# EAGLE board STorM32 NT splitter v001 (EAGLE 6.5.0)
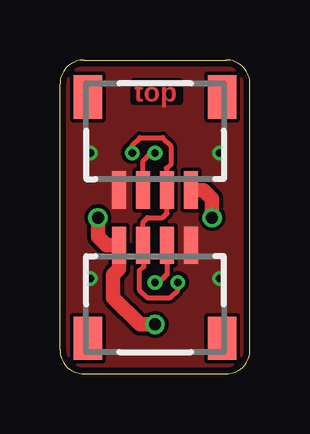
[diagram p0: board, top side]
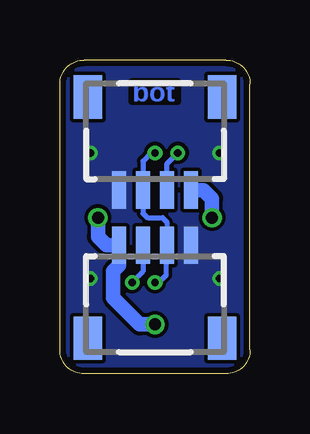
[diagram p1: board, bottom side, seen from below]

Size 7.94 x 13.08 mm. Coordinates in mm from the lower left corner, seen from the top.
Outline: 1,13.08 6.94,13.08 arc-90 7.94,12.08 7.94,1 arc-90 6.94,0 1,0 arc-90 0,1 0,12.08 arc-90 1,13.08
Copper layers (1*16): Top 0.035mm / dielectric 1.5mm / Bottom 0.035mm
Design rules "Fusion_eagle_rule_v1.1-shapes-supply-changed": minimum track width 6mil, minimum drill 12mil, track to track 6mil, track to pad 6mil, pad to pad 6mil, via to via 6mil, smd to smd 0mil, copper to edge 10mil, drill to drill 10mil, minimum pad ring 10mil, minimum via ring 6mil, stop-mask expansion 2mil, vias tented up to drill 100mil, thermal gap 6mil

## Footprints (pad centres in the part's own frame; a part is rotated, then mirrored left to right if it is on the bottom)
SM04B-SRSS-TB = smd 0.6 x 1.55: 1 -1.5,2.975; 2 -0.5,2.975; 3 0.5,2.975; 4 1.5,2.975 | smd 1.2 x 1.8: FIT@1 -2.8,-0.9; FIT@2 2.8,-0.9

## Placement (x,y rotation side)
NTX  NTX  [SM04B-SRSS-TB]  3.97,2.38 0 top
NTX1  NTX  [SM04B-SRSS-TB]  3.97,10.64 180 bottom
NTX2  NTX  [SM04B-SRSS-TB]  3.97,2.38 0 bottom
NTX3  NTX  [SM04B-SRSS-TB]  3.97,10.64 180 top

## Library data of the parts
NTX NTX1-NTX3 = con-jst2

## Nets
5V: NTX1.1 NTX2.1 NTX3.1 NTX.1
GND: NTX1.4 NTX2.4 NTX3.4 NTX.4
RX: NTX1.2 NTX2.2 NTX3.2 NTX.2
TX: NTX1.3 NTX2.3 NTX3.3 NTX.3

## Tracks (layer width: path | path; a pad name or v marks a point on that pad's centre or on a via)
5V  (via drill 0.5)
  Top 0.61: v1.59,6.51 1.59,5.71 1.95,5.36 NTX.1 2.47,4.37 2.22,4.13 2.22,3.17 3.33,2.06 v3.97,2.06 | NTX3.1 5.99,7.66 6.35,7.3 v6.35,6.51
  Bottom 0.61: v1.59,6.51 1.59,7.3 1.95,7.66 NTX1.1 | v6.35,6.51 6.35,5.71 5.99,5.36 NTX2.1 5.47,4.53 5.71,4.29 5.71,3.17 4.6,2.06 v3.97,2.06
GND  (via drill 0.3)
  other vias: 1.27,3.97 6.67,3.97 1.27,9.21 6.67,9.21
  pour Bottom (isolate 0.152): 0.33,12.08 arc-90 1,12.75 6.94,12.75 arc-90 7.61,12.08 7.61,1 arc-90 6.94,0.33 1,0.33 arc-90 0.33,1
  pour Top (isolate 0.152): 0.33,12.08 arc-90 1,12.75 6.94,12.75 arc-90 7.61,12.08 7.61,1 arc-90 6.94,0.33 1,0.33 arc-90 0.33,1
  pour Top (no thermals): 5.08,6.35 6.11,6.35 6.11,4.13 5.08,4.13
  pour Top (no thermals): 2.86,8.73 2.86,6.51 1.91,6.51 1.91,8.73
  pour Bottom (no thermals): 5,8.73 5,6.51 6.03,6.51 6.03,8.73
  pour Bottom (no thermals): 1.83,6.51 2.94,6.51 2.94,3.89 1.83,3.89
RX  (via drill 0.3)
  Top 0.203: v3.02,9.21 3.02,9.53 3.33,9.84 4.29,9.84 4.63,9.5 4.63,8.71 4.45,8.57 NTX3.2 4.47,6.69 4.29,6.51 3.65,6.51 3.47,6.33 NTX.2 3.49,4.45 3.31,4.31 3.31,3.52 3.65,3.17 4.6,3.17 4.92,3.49 v4.92,3.81
  Bottom 0.203: NTX1.2 3.47,8.76 v3.02,9.21 | NTX2.2 4.47,4.26 v4.92,3.81
TX  (via drill 0.3)
  Top 0.203: NTX.3 4.47,4.15 4.13,3.81 v3.97,3.81 | NTX3.3 3.47,8.87 3.81,9.21 v3.97,9.21
  Bottom 0.203: v3.97,3.81 3.81,3.81 3.49,4.13 3.49,5.33 NTX2.3 3.47,6.33 3.65,6.51 4.29,6.51 4.47,6.69 NTX1.3 4.47,8.87 4.13,9.21 v3.97,9.21

## Text on the board
Top: top
Bottom: bot